# EAGLE board berta (EAGLE 6.4)

Size 100 x 80 mm. Coordinates in mm from the lower left corner, seen from the top.
Outline: 0,0 100,0 100,80 0,80 0,0
Copper layers (1*16): Top 0.035mm / dielectric 1.5mm / Bottom 0.035mm
Design rules "default": minimum track width 10mil, minimum drill 24mil, track to track 8mil, track to pad 8mil, pad to pad 8mil, via to via 8mil, smd to smd 8mil, copper to edge 40mil, drill to drill 8mil, minimum pad ring 10mil, minimum via ring 8mil, stop-mask expansion 4mil, vias tented up to drill 0mil, thermal gap 10mil
Net classes: 2 VIN: width 0.61 mm, drill 0.61 mm, clearance 0.305 mm; 3 fine: width 0.203 mm; 4 aref: width 0.254 mm, drill 0.61 mm, clearance 0.254 mm

## Footprints (pad centres in the part's own frame; a part is rotated, then mirrored left to right if it is on the bottom)
C0805 = smd 1.3 x 1.5: 1 -0.95,0; 2 0.95,0
C050-045X075 = drill 0.813 octagon: 1 -2.54,0; 2 2.54,0
EIA3216-KIT = smd 1.9 x 1.6: A 1.65,0; C -1.65,0
C0603-ROUND = smd 0.898 x 1.1: 1 -0.889,0; 2 0.889,0
TINYISP = drill 0.914 octagon: GND 2.54,1.27; MOSI 0,1.27; RESET 2.54,-1.27; SCK 0,-1.27; VCC -2.54,1.27 | drill 0.914: MISO -2.54,-1.27
SMADIODE = smd 2.54 x 2.54: A 2.349,0; C -2.349,0
LED-1206 = smd 1.2 x 1.4: A -1.5,0; C 1.5,0
C1812 = smd 1.9 x 3.4: 1 -1.95,0; 2 1.95,0
RJ12-STRAIGHT-I2C = drill 0.9 pad 1.4: +5V 1.905,8.89; +12V -3.175,8.89; GND1 3.175,6.35; GND2 0.635,6.35; SCL -1.905,6.35; SDA -0.635,8.89 | hole 3.251: -5.08,0; 5.08,0
SOT143-R = smd 1 x 0.7: 1 -0.75,-1 | smd 0.6 x 0.7: 2 0.95,-1; 3 0.95,1; 4 -0.95,1
SQFP80 = smd 1.6 x 0.25: 1 -5.6,3.8; 2 -5.6,3.4; 3 -5.6,3; 4 -5.6,2.6; 5 -5.6,2.2; 6 -5.6,1.8; 7 -5.6,1.4; 8 -5.6,1; 9 -5.6,0.6; 10 -5.6,0.2; 11 -5.6,-0.2; 12 -5.6,-0.6; 13 -5.6,-1; 14 -5.6,-1.4; 15 -5.6,-1.8; 16 -5.6,-2.2; 17 -5.6,-2.6; 18 -5.6,-3; 19 -5.6,-3.4; 20 -5.6,-3.8; 41 5.6,-3.8; 42 5.6,-3.4; 43 5.6,-3; 44 5.6,-2.6; 45 5.6,-2.2; 46 5.6,-1.8; 47 5.6,-1.4; 48 5.6,-1; 49 5.6,-0.6; 50 5.6,-0.2; 51 5.6,0.2; 52 5.6,0.6; 53 5.6,1; 54 5.6,1.4; 55 5.6,1.8; 56 5.6,2.2; 57 5.6,2.6; 58 5.6,3; 59 5.6,3.4; 60 5.6,3.8 | smd 0.25 x 1.6: 21 -3.8,-5.6; 22 -3.4,-5.6; 23 -3,-5.6; 24 -2.6,-5.6; 25 -2.2,-5.6; 26 -1.8,-5.6; 27 -1.4,-5.6; 28 -1,-5.6; 29 -0.6,-5.6; 30 -0.2,-5.6; 31 0.2,-5.6; 32 0.6,-5.6; 33 1,-5.6; 34 1.4,-5.6; 35 1.8,-5.6; 36 2.2,-5.6; 37 2.6,-5.6; 38 3,-5.6; 39 3.4,-5.6; 40 3.8,-5.6; 61 3.8,5.6; 62 3.4,5.6; 63 3,5.6; 64 2.6,5.6; 65 2.2,5.6; 66 1.8,5.6; 67 1.4,5.6; 68 1,5.6; 69 0.6,5.6; 70 0.2,5.6; 71 -0.2,5.6; 72 -0.6,5.6; 73 -1,5.6; 74 -1.4,5.6; 75 -1.8,5.6; 76 -2.2,5.6; 77 -2.6,5.6; 78 -3,5.6; 79 -3.4,5.6; 80 -3.8,5.6
DD-3 = smd 1.27 x 5.08: 1 -2.54,-7.938; 2 0,-7.938; 3 2.54,-7.938
RJ12-STRAIGHT = drill 0.9 pad 1.4: +5V 1.905,8.89; +12V -3.175,8.89; GND1 3.175,6.35; GND2 0.635,6.35; I/O -0.635,8.89; PWM -1.905,6.35 | hole 3.251: -5.08,0; 5.08,0
RJ12-STRAIGHT-RS232 = drill 0.9 pad 1.4: +5V 1.905,8.89; +12V -3.175,8.89; GND1 3.175,6.35; GND2 0.635,6.35; RX -1.905,6.35; TX -0.635,8.89 | hole 3.251: -5.08,0; 5.08,0
1X02 = drill 1.016 pad 1.88: 1 0,0; 2 2.54,0
2X06 = drill 1.016 octagon: 1 -6.35,-1.27; 2 -6.35,1.27; 3 -3.81,-1.27; 4 -3.81,1.27; 5 -1.27,-1.27; 6 -1.27,1.27; 7 1.27,-1.27; 8 1.27,1.27; 9 3.81,-1.27; 10 3.81,1.27; 11 6.35,-1.27; 12 6.35,1.27
L2012C = smd 1 x 1: 1 -1,0; 2 1,0
BICOLOR-3MM = drill 0.8 pad 1.4: 1 -2.54,0; 2 0,0; 3 2.54,0
SML0805 = smd 1.2 x 1.2: A 1.05,0; C -1.05,0
LED3MM = drill 0.813 octagon: A -1.27,0; K 1.27,0
PG-SOT-223 = smd 1.2 x 1.4: 1 -2.311,-3.099; 2 0,-3.099; 3 2.311,-3.099 | smd 3.5 x 1.4: 4 0,3.099
SOT23-3 = smd 0.8 x 0.9: 1 -0.95,-1; 2 0.95,-1; 3 0,1.1
M0805 = smd 1.3 x 1.6: 1 -0.95,0; 2 0.95,0
R0805W = smd 1.5 x 1: 1 -1.052,0; 2 1.052,0
M1206 = smd 1.6 x 2: 1 -1.4,0; 2 1.4,0
R0805 = smd 1.3 x 1.5: 1 -0.95,0; 2 0.95,0
TACTILE_SWITCH_SMD = smd 1.524 x 0.762: 1 -2.54,1.905; 2 2.54,1.905; 3 -2.54,-1.905; 4 2.54,-1.905
CAY16 = smd 0.5 x 0.65: 1 -1.2,-0.675; 2 -0.4,-0.675; 3 0.4,-0.675; 4 1.2,-0.675; 5 1.2,0.675; 6 0.4,0.675; 7 -0.4,0.675; 8 -1.2,0.675
QFN44ML7X7 = smd 0.75 x 0.275: 1 -3.275,2.5; 2 -3.275,2; 3 -3.275,1.5; 4 -3.275,1; 5 -3.275,0.5; 6 -3.275,0; 7 -3.275,-0.5; 8 -3.275,-1; 9 -3.275,-1.5; 10 -3.275,-2; 11 -3.275,-2.5; 23 3.275,-2.5; 24 3.275,-2; 25 3.275,-1.5; 26 3.275,-1; 27 3.275,-0.5; 28 3.275,0; 29 3.275,0.5; 30 3.275,1; 31 3.275,1.5; 32 3.275,2; 33 3.275,2.5 | smd 0.275 x 0.75: 12 -2.5,-3.275; 13 -2,-3.275; 14 -1.5,-3.275; 15 -1,-3.275; 16 -0.5,-3.275; 17 0,-3.275; 18 0.5,-3.275; 19 1,-3.275; 20 1.5,-3.275; 21 2,-3.275; 22 2.5,-3.275; 34 2.5,3.275; 35 2,3.275; 36 1.5,3.275; 37 1,3.275; 38 0.5,3.275; 39 0,3.275; 40 -0.5,3.275; 41 -1,3.275; 42 -1.5,3.275; 43 -2,3.275; 44 -2.5,3.275 | smd 4.826 x 4.826: EXP 0,0
HY931147C = drill 1.63 octagon: GND1 3.05,7.745; GND2 3.05,-7.745 | drill 0.9 square: P$1 8.89,5.715 | drill 0.9: P$2 6.35,4.445; P$3 8.89,3.175; P$4 6.35,1.905; P$5 8.89,0.635; P$6 6.35,-0.635; P$7 8.89,-1.905; P$8 6.35,-3.175; P$9 8.89,-4.445; P$10 6.35,-5.715 | drill 1.016: P$11 -4.08,6.625; P$12 -4.08,4.085; P$13 -4.08,-4.085; P$14 -4.08,-6.625 | hole 3.25: 0,5.715; 0,-5.715
SO08 = smd 0.61 x 2.21: 1 -1.905,-2.616; 2 -0.635,-2.616; 3 0.635,-2.616; 4 1.905,-2.616; 5 1.905,2.616; 6 0.635,2.616; 7 -0.635,2.616; 8 -1.905,2.616
KPJX-4S-S = drill 2 square: +5V 2.7,1.35; +12V -2.7,1.35; GND1 -2.5,5; GND2 2.5,5 | drill 2: P$1 -7.8,0; P$2 7.8,0; P$11 0,10.5 | drill 2.2: P$3 -7.8,8.5; P$4 7.8,8.5 | hole 1.7: -2.5,8.5; 2.5,8.5
UX60-MB-5ST = smd 2 x 0.5: 1 2.25,1.6; 2 2.25,0.8; 3 2.25,0; 4 2.25,-0.8; 5 2.25,-1.6 | smd 2.2 x 2.5: M1 -3.3,-4.2; M2 -3.3,4.2; M3 2,4.2; M4 2,-4.2 | hole 0.9: 0,-1.75; 0,1.75
HC49U-V = drill 0.813: 1 -2.413,0; 2 2.413,0
HC49US = drill 0.7 pad 1.651: 1 -2.54,0; 2 2.54,0

## Placement (x,y rotation side)
C1  100n  [C0805]  -16.51,90.17 0 top  (outside the outline)
C2  100n  [C0805]  -22.86,90.17 0 top  (outside the outline)
C3  22pF  [C0805]  -74.93,83.82 0 top  (outside the outline)
C4  22pF  [C0805]  -81.28,83.82 0 top  (outside the outline)
C5  470nF  [C0805]  -102.87,77.47 0 top  (outside the outline)
C6  33uF 10V  [C050-045X075]  -17.78,69.85 0 top  (outside the outline)
C7  1uF  [C0805]  -97.79,96.52 0 top  (outside the outline)
C8  10u  [C0805]  -102.87,96.52 0 top  (outside the outline)
C9  100n  [C0805]  -29.21,90.17 0 top  (outside the outline)
C10  10uF 20V  [EIA3216-KIT]  -97.79,-63.5 0 top  (outside the outline)
C11  100nF  [C0805]  -17.78,83.82 0 top  (outside the outline)
C12  100n  [C0603-ROUND]  -86.36,-52.07 0 top  (outside the outline)
C13  100nF  [C0805]  -24.13,83.82 0 top  (outside the outline)
C14  10nF  [C0805]  -87.63,83.82 0 top  (outside the outline)
C15  10uF 6.3V A TANT  [C0805]  -58.42,68.58 0 top  (outside the outline)
C22  13pF  [C0805]  -93.98,83.82 0 top  (outside the outline)
C23  100nF  [C0805]  -30.48,83.82 0 top  (outside the outline)
C24  100nF  [C0805]  -36.83,83.82 0 top  (outside the outline)
C25  100nF  [C0805]  -43.18,83.82 0 top  (outside the outline)
C26  100nF  [C0805]  -49.53,83.82 0 top  (outside the outline)
C31  13pF  [C0805]  -100.33,83.82 0 top  (outside the outline)
C32  10uF 6.3V A TANT  [C0805]  -76.2,68.58 0 top  (outside the outline)
C34  10uF 6.3V A TANT  [C0805]  -93.98,68.58 0 top  (outside the outline)
C35  100nF  [C0805]  -55.88,83.82 0 top  (outside the outline)
C36  100nF  [C0805]  -62.23,83.82 0 top  (outside the outline)
C37  100nF  [C0805]  -68.58,83.82 0 top  (outside the outline)
CON1  SPI  [TINYISP]  -100.33,-36.83 0 top  (outside the outline)
D1  Diode  [SMADIODE]  -40.64,107.95 0 top  (outside the outline)
D2  1N581D1206  [LED-1206]  -93.98,-57.15 0 top  (outside the outline)
D3  1N581D1206  [LED-1206]  -87.63,-57.15 0 top  (outside the outline)
D4  1N581D1206  [LED-1206]  -104.14,-63.5 0 top  (outside the outline)
F1  0.5A  [C1812]  -34.29,68.58 0 top  (outside the outline)
F2  0.5A  [C1812]  -40.64,68.58 0 top  (outside the outline)
I2C_INT0  I2C  [RJ12-STRAIGHT-I2C]  -21.59,8.89 0 top  (outside the outline)
IC1  APX811-44UG-7  [SOT143-R]  -104.14,-154.94 0 top  (outside the outline)
IC2  W5100SQFP80  [SQFP80]  -60.96,43.18 0 top  (outside the outline)
IC3  LM3940IS-3.3F  [DD-3]  -83.82,11.43 0 top  (outside the outline)
J1  RJ12STRAIGHT  [RJ12-STRAIGHT]  -24.13,26.67 0 top  (outside the outline)
J2  RJ12STRAIGHT  [RJ12-STRAIGHT]  -44.45,26.67 0 top  (outside the outline)
J3  RJ12STRAIGHT  [RJ12-STRAIGHT]  -64.77,26.67 0 top  (outside the outline)
J4  RJ12STRAIGHT  [RJ12-STRAIGHT]  -85.09,26.67 0 top  (outside the outline)
J5  RS232  [RJ12-STRAIGHT-RS232]  -40.64,8.89 0 top  (outside the outline)
J7  RJ12STRAIGHT  [RJ12-STRAIGHT]  -24.13,43.18 0 top  (outside the outline)
JP3  JP3  [1X02]  -24.13,107.95 0 top  (outside the outline)
JP4  JP4  [1X02]  -30.48,107.95 0 top  (outside the outline)
JP5  Extansion Port  [2X06]  -99.06,-24.13 0 top  (outside the outline)
L1  1uH 250mA 0805  [L2012C]  -25.4,77.47 0 top  (outside the outline)
L2  1uH 250mA 0805  [L2012C]  -40.64,77.47 0 top  (outside the outline)
LED1  BICOLOR-LED  [BICOLOR-3MM]  -102.87,-45.72 0 top  (outside the outline)
LED2  Blue  [SML0805]  -80.01,102.87 0 top  (outside the outline)
LED3  GREEN  [SML0805]  -59.69,107.95 0 top  (outside the outline)
LED4  [LED3MM]  -104.14,-58.42 0 top  (outside the outline)
LED5  Blue  [SML0805]  -86.36,102.87 0 top  (outside the outline)
LED6  Blue  [SML0805]  -92.71,102.87 0 top  (outside the outline)
LED7  BLue  [SML0805]  -99.06,102.87 0 top  (outside the outline)
LED8  Blue  [SML0805]  -105.41,102.87 0 top  (outside the outline)
LED9  GREEN  [SML0805]  -66.04,107.95 0 top  (outside the outline)
LED10  GREEN  [SML0805]  -53.34,107.95 0 top  (outside the outline)
LED11  BICOLOR-LED  [BICOLOR-3MM]  -102.87,-91.44 0 top  (outside the outline)
Q1  BSP613P  [PG-SOT-223]  -102.87,-111.76 0 top  (outside the outline)
Q2  BSP613P  [PG-SOT-223]  -102.87,-120.65 0 top  (outside the outline)
Q3  2N7002  [SOT23-3]  -46.99,107.95 0 top  (outside the outline)
Q4  BSP613P  [PG-SOT-223]  -102.87,-129.54 0 top  (outside the outline)
Q5  BSP613P  [PG-SOT-223]  -102.87,-138.43 0 top  (outside the outline)
Q6  BSP613P  [PG-SOT-223]  -102.87,-147.32 0 top  (outside the outline)
R  1k  [M0805]  -25.4,102.87 0 top  (outside the outline)
R1  10k  [M0805]  -20.32,102.87 0 top  (outside the outline)
R2  1k  [R0805W]  -15.24,102.87 0 top  (outside the outline)
R3  1M  [R0805W]  -105.41,-104.14 0 top  (outside the outline)
R4  1k  [M0805]  -30.48,102.87 0 top  (outside the outline)
R5  1k  [M0805]  -35.56,102.87 0 top  (outside the outline)
R6  1k  [M0805]  -40.64,102.87 0 top  (outside the outline)
R7  1k  [M0805]  -45.72,102.87 0 top  (outside the outline)
R8  1K  [M1206]  -91.44,90.17 0 top  (outside the outline)
R9  1K  [M1206]  -96.52,90.17 0 top  (outside the outline)
R10  1K  [M1206]  -101.6,90.17 0 top  (outside the outline)
R11  1K  [M1206]  -15.24,96.52 0 top  (outside the outline)
R12  10K  [M1206]  -20.32,96.52 0 top  (outside the outline)
R14  10K  [M1206]  -25.4,96.52 0 top  (outside the outline)
R16  10k  [M0805]  -57.15,96.52 0 top  (outside the outline)
R17  1k  [M0805]  -62.23,96.52 0 top  (outside the outline)
R18  10k  [M0805]  -67.31,96.52 0 top  (outside the outline)
R19  1k  [R0805W]  -48.26,90.17 0 top  (outside the outline)
R20  49.9 1%  [R0805W]  -69.85,77.47 0 top  (outside the outline)
R21  49.9 1%  [R0805W]  -78.74,77.47 0 top  (outside the outline)
R22  49.9 1%  [R0805W]  -87.63,77.47 0 top  (outside the outline)
R23  49.9 1%  [R0805W]  -96.52,77.47 0 top  (outside the outline)
R24  10k  [R0805W]  -54.61,90.17 0 top  (outside the outline)
R25  1k  [M0805]  -72.39,96.52 0 top  (outside the outline)
R26  1k  [R0805W]  -60.96,90.17 0 top  (outside the outline)
R27  1K  [M1206]  -30.48,96.52 0 top  (outside the outline)
R28  1k  [R0805W]  -67.31,90.17 0 top  (outside the outline)
R29  1M  [R0805W]  -73.66,90.17 0 top  (outside the outline)
R30  12k3 1%  [R0805W]  -60.96,77.47 0 top  (outside the outline)
R31  1k  [R0805]  -105.41,-10.16 0 top  (outside the outline)
R32  1k  [M0805]  -77.47,96.52 0 top  (outside the outline)
R33  1k  [M0805]  -82.55,96.52 0 top  (outside the outline)
R34  1k  [M0805]  -87.63,96.52 0 top  (outside the outline)
R35  1k  [M0805]  -92.71,96.52 0 top  (outside the outline)
R36  10k  [M0805]  -105.41,-15.24 0 top  (outside the outline)
R37  22  [M1206]  -104.14,-83.82 0 top  (outside the outline)
R38  22  [M1206]  -97.79,-83.82 0 top  (outside the outline)
RESET  Reset uC  [TACTILE_SWITCH_SMD]  -52.07,102.87 0 top  (outside the outline)
RL1  1K  [M1206]  -104.14,-97.79 0 top  (outside the outline)
RL2  1K  [R0805W]  -80.01,90.17 0 top  (outside the outline)
RL3  1K  [R0805W]  -86.36,90.17 0 top  (outside the outline)
RL4  1K  [M1206]  -104.14,-52.07 0 top  (outside the outline)
RL5  1K  [M1206]  -97.79,-52.07 0 top  (outside the outline)
RL6  1K  [M1206]  -91.44,-52.07 0 top  (outside the outline)
RL7  1K  [M1206]  -97.79,-97.79 0 top  (outside the outline)
RN1  10K  [CAY16]  -41.91,96.52 0 top  (outside the outline)
RX1  RED  [SML0805]  -105.41,-3.81 0 top  (outside the outline)
U1  ATMEGA32U4-XUMU  [QFN44ML7X7]  -93.98,43.18 0 top  (outside the outline)
U2  HY931147C-RJ45  [HY931147C]  -62.23,10.16 0 top  (outside the outline)
U$5  SPI_FLASH-X25XXSMD  [SO08]  -27.94,68.58 0 top  (outside the outline)
U$6  KPJX-4S-S  [KPJX-4S-S]  -41.91,39.37 0 top  (outside the outline)
X1  MINI-USB-UX60-MB-5ST  [UX60-MB-5ST]  -100.33,-72.39 0 top  (outside the outline)
X2  25MHz  [HC49U-V]  -78.74,58.42 0 top  (outside the outline)
Y1  16Mhz  [HC49US]  -100.33,57.15 0 top  (outside the outline)

## Library data of the parts
C1-C9 C11 C13-C15 C22-C26 C31 C32 C34-C37 L1 L2 R R1-R7 R16-R26 R28-R36 RL2 RL3 = rcl
C10 JP3 JP4 RESET U$5 Y1 = SparkFun
C12 U1 = SmartPrj
CON1 = lpatiny; OC_FARNELL: unknown; OC_NEWARK: unknown
D1 = adafruit
D2-D4 F1 F2 I2C_INT0 J1-J5 J7 LED1 LED4 LED11 U$6 = lpatiny
IC1 X2 = freetronics-master-v1
IC2 = freetronics-marc
IC3 = lpatiny; MF: TEXAS INSTRUMENTS; MPN: REG1117FAKTTT; OC_FARNELL: 1296120; OC_NEWARK: 87H2562
JP5 = pinhead
LED2 LED3 LED5-LED10 RX1 = led
Q1 Q2 Q4-Q6 = infineon; OC_FARNELL: unknown; OC_NEWARK: unknown
Q3 = freetronics
R8-R12 R14 R27 R37 R38 RL1 RL4-RL7 = resistor
RN1 = resistor-dil
U2 = freetronics-jon
X1 = con-hirose; OC_FARNELL: unknown; OC_NEWARK: unknown

## Nets
1V8_OUT: C15.1 C26.1 IC2.11 IC2.15 IC2.16 L1.1
1V8A: C32.1 C35.1 IC2.7 IC2.74 L1.2
1V8OUT: C36.1 IC2.33 IC2.69
3.3V: C6.1 C7.1 IC3.3 R1.2 R16.2 R27.2 U1.6 U$5.8
3V3A: C14.1 C34.1 C37.1 IC2.2 L2.2 U2.P$3 U2.P$4
3V3D: C25.1 IC2.12 IC2.18 IC2.44 L2.1 R26.1 R28.2 U2.P$11 U2.P$13
5V [power]: IC1.4
+3V3 [power]: C13.1
+5V [fine]: C1.2 C2.2 C5.1 C10.A C12.2 D2.C D3.A D3.C D4.C F2.2 I2C_INT0.+5V IC3.1 J1.+5V J2.+5V J3.+5V J4.+5V J5.+5V J7.+5V JP5.2 R4.2 R5.2 R6.2 R7.2 R12.2 R14.2 R24.2 R25.2 R31.2 RL2.2 RL4.1 RN1.5 U1.14 U1.24 U1.34 U1.44
+12V: F1.2 I2C_INT0.+12V J1.+12V J2.+12V J3.+12V J4.+12V J5.+12V J7.+12V RL3.2
/RESET: IC2.59
A0: R.1 U1.36
A1: R32.1 U1.37
A2: R33.1 U1.38
A3: R34.1 U1.39
A4: R35.1 U1.40
A5: JP5.9 U1.41
A9: JP5.10 U1.26
AREF: C11.1 U1.42
COLLED: IC2.71
CS: R17.2 U1.25
D2B4: I2C_INT0.SDA R8.1
D2B5: J5.TX R9.1
D5*: Q1.1 U1.31
D6*: Q2.1 U1.27
D9*: Q4.1 U1.29
D10*: Q5.1 U1.30
D11*: Q6.1 U1.12
D13: RX1.C U1.32
D+: R37.2 X1.3
D-: R38.2 X1.2
FDXLED: IC2.70 R2.2
FMOSI: D1.A R1.1 U$5.5
GND [VIN]: C1.1 C2.1 C3.1 C4.1 C5.2 C6.2 C7.2 C8.2 C9.1 C10.C C11.2 C12.1 C13.2 C14.2 C15.2 C22.2 C23.2 C24.2 C25.2 C26.2 C31.2 C32.2 C34.2 C35.2 C36.2 C37.2 CON1.GND I2C_INT0.GND1 I2C_INT0.GND2 IC1.1 IC2.4 IC2.10 IC2.13 IC2.14 IC2.17 IC2.19 IC2.20 IC2.21 IC2.22 IC2.23 IC2.24 IC2.25 IC2.26 IC2.32 IC2.34 IC2.35 IC2.36 IC2.37 IC2.38 IC2.39 IC2.40 IC2.41 IC2.42 IC2.43 IC2.45 IC2.46 IC2.47 IC2.48 IC2.49 IC2.50 IC2.51 IC2.52 IC2.53 IC2.54 IC2.63 IC2.64 IC2.65 IC2.68 IC2.77 IC3.2 J1.GND1 J1.GND2 J2.GND1 J2.GND2 J3.GND1 J3.GND2 J4.GND1 J4.GND2 J5.GND1 J5.GND2 J7.GND1 J7.GND2 JP3.1 JP5.12 LED1.2 LED3.C LED4.K LED9.C LED10.C LED11.2 Q1.2 Q2.2 Q3.2 Q4.2 Q5.2 Q6.2 R30.1 R36.2 RESET.3 RESET.4 U1.5 U1.15 U1.23 U1.35 U1.43 U1.EXP U2.GND1 U2.GND2 U$5.4 U$6.GND1 U$6.GND2 X1.5
HWB: JP3.2 R24.1 U1.33
INT: IC2.56 U1.1
ISP+5V: CON1.VCC D2.A
LINKLED: IC2.66 R19.2
MISO: CON1.MISO IC2.27 U1.11
MOSI: CON1.MOSI D1.C IC2.28 U1.10
N$1: J2.PWM LED6.C Q4.3
N$2: J1.I/O R32.2
N$3: R31.1 RX1.A
N$4: LED5.A Q2.3 R4.1
N$5: J3.PWM LED7.C Q5.3
N$6: U$5.7
N$7: J2.I/O R33.2
N$8: LED11.3 RL1.2
N$9: C24.1 R22.1 R23.1
N$10: R16.1 R17.1 U$5.1
N$11: R36.1 U$5.3
N$12: LED4.A RL4.2
N$13: LED1.3 RL5.2
N$14: LED11.1 RL7.2
N$15: LED1.1 RL6.2
N$18: J7.I/O R.2
N$19: J4.PWM LED8.C Q6.3
N$20: LED3.A R27.1
N$21: LED2.A Q1.3 R25.1
N$22: LED6.A R5.1
N$23: R18.2 U$5.6
N$24: IC2.55 IC2.57 IC2.58 R28.1
N$27: JP5.11
N$28: J1.PWM LED5.C
N$29: J3.I/O R34.2
N$30: LED7.A R6.1
N$31: JP5.4
N$32: J4.I/O R35.2
N$33: LED8.A R7.1
N$34: J7.PWM LED2.C
N$38: F2.1 U$6.+5V
N$39: F1.1 U$6.+12V
N$67: R2.1 U2.P$14
N$70: J5.RX R10.1
N$71: I2C_INT0.SCL R11.1
N$75: LED10.A RL3.1
N$76: LED9.A RL2.1
N$321: C23.1 R20.1 R21.1
N$322: IC2.1 R30.2
N$332: R19.1 U2.P$12
RD+: R37.1 RL7.1 U1.4
RD-: R38.1 RL1.1 U1.3
RESET: CON1.RESET IC1.3 RESET.1 RESET.2 RN1.4 U1.13
RX: JP5.8 R10.2 U1.20
RXIN: IC2.6 R21.2 U2.P$2
RXIP: IC2.5 R20.2 U2.P$1
RXLED: RL5.1 U1.8
SCK: IC2.30 R18.1 U1.9
SCL: JP5.6 R11.2 R12.1 U1.18
SDA: JP5.5 R8.2 R14.1 U1.19
SEN: IC2.31 Q3.3 R26.2
SPDLED: IC2.67
SS: IC2.29 Q3.1 U1.28
TX: JP5.7 R9.2 U1.21
TXLED: U1.22
TXLED1: RL6.1
TXON: IC2.9 R23.2 U2.P$6
TXOP: IC2.8 R22.2 U2.P$5
VUSB: C8.1 C9.2 D4.A U1.2 U1.7 X1.1
WIZRST: IC1.2
WRXLED: IC2.72
WTXLED: IC2.73
XTAL1: C3.2 R3.1 U1.17 Y1.1
XTAL2: C4.2 R3.2 U1.16 Y1.2
XTLN: C31.1 IC2.75 R29.2 X2.2
XTLP: C22.1 IC2.76 R29.1 X2.1

## Tracks (layer width: path | path; a pad name or v marks a point on that pad's centre or on a via)
1V8_OUT  (5 unrouted)
1V8A  (4 unrouted)
1V8OUT  (2 unrouted)
3.3V  (7 unrouted)
3V3A  (6 unrouted)
3V3D  (8 unrouted)
+5V  (34 unrouted)
+12V  (8 unrouted)
A0  (1 unrouted)
A1  (1 unrouted)
A2  (1 unrouted)
A3  (1 unrouted)
A4  (1 unrouted)
A5  (1 unrouted)
A9  (1 unrouted)
AREF  (1 unrouted)
CS  (1 unrouted)
D2B4  (1 unrouted)
D2B5  (1 unrouted)
D5*  (1 unrouted)
D6*  (1 unrouted)
D9*  (1 unrouted)
D10*  (1 unrouted)
D11*  (1 unrouted)
D13  (1 unrouted)
D+  (1 unrouted)
D-  (1 unrouted)
FDXLED  (1 unrouted)
FMOSI  (2 unrouted)
GND  (111 unrouted)
HWB  (2 unrouted)
INT  (1 unrouted)
ISP+5V  (1 unrouted)
LINKLED  (1 unrouted)
MISO  (2 unrouted)
MOSI  (3 unrouted)
N$1  (2 unrouted)
N$2  (1 unrouted)
N$3  (1 unrouted)
N$4  (2 unrouted)
N$5  (2 unrouted)
N$7  (1 unrouted)
N$8  (1 unrouted)
N$9  (2 unrouted)
N$10  (2 unrouted)
N$11  (1 unrouted)
N$12  (1 unrouted)
N$13  (1 unrouted)
N$14  (1 unrouted)
N$15  (1 unrouted)
N$18  (1 unrouted)
N$19  (2 unrouted)
N$20  (1 unrouted)
N$21  (2 unrouted)
N$22  (1 unrouted)
N$23  (1 unrouted)
N$24  (3 unrouted)
N$28  (1 unrouted)
N$29  (1 unrouted)
N$30  (1 unrouted)
N$32  (1 unrouted)
N$33  (1 unrouted)
N$34  (1 unrouted)
N$38  (1 unrouted)
N$39  (1 unrouted)
N$67  (1 unrouted)
N$70  (1 unrouted)
N$71  (1 unrouted)
N$75  (1 unrouted)
N$76  (1 unrouted)
N$321  (2 unrouted)
N$322  (1 unrouted)
N$332  (1 unrouted)
RD+  (2 unrouted)
RD-  (2 unrouted)
RESET  (5 unrouted)
RX  (2 unrouted)
RXIN  (2 unrouted)
RXIP  (2 unrouted)
RXLED  (1 unrouted)
SCK  (2 unrouted)
SCL  (3 unrouted)
SDA  (3 unrouted)
SEN  (2 unrouted)
SS  (2 unrouted)
TX  (2 unrouted)
TXON  (2 unrouted)
TXOP  (2 unrouted)
VUSB  (5 unrouted)
XTAL1  (3 unrouted)
XTAL2  (3 unrouted)
XTLN  (3 unrouted)
XTLP  (3 unrouted)